# Altium PCB DCDC_1.0.0.PcbDoc
Units mm, origin at the board's own origin, x right, y up, seen from the top; angles counter-clockwise.
Board outline 30 x 19 mm, 2 copper layers (Component Side, Solder Side), stack 1.672 mm thick; 32 components, 9 nets, 68 pads, 25 vias.
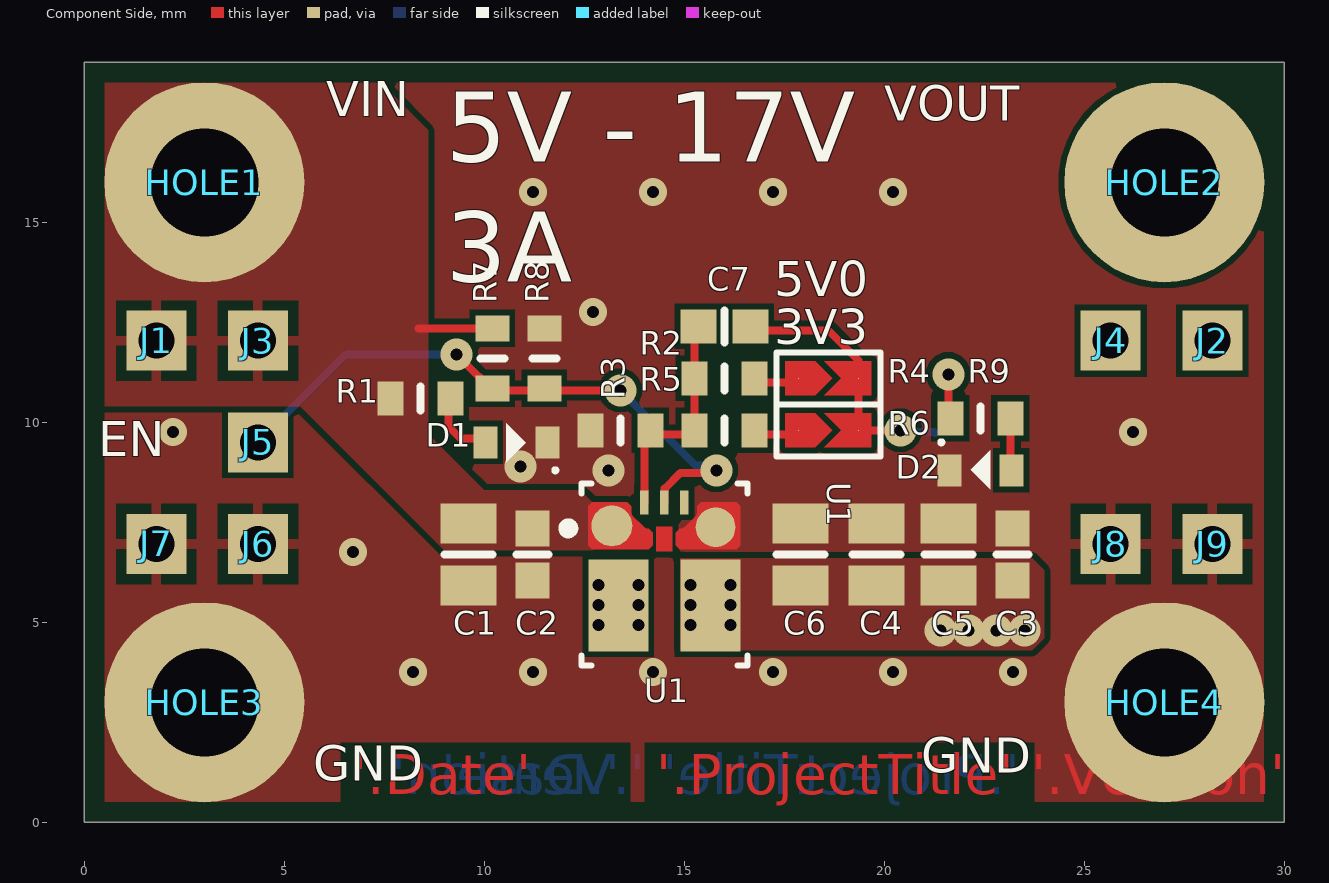
[diagram p0: Component Side view]
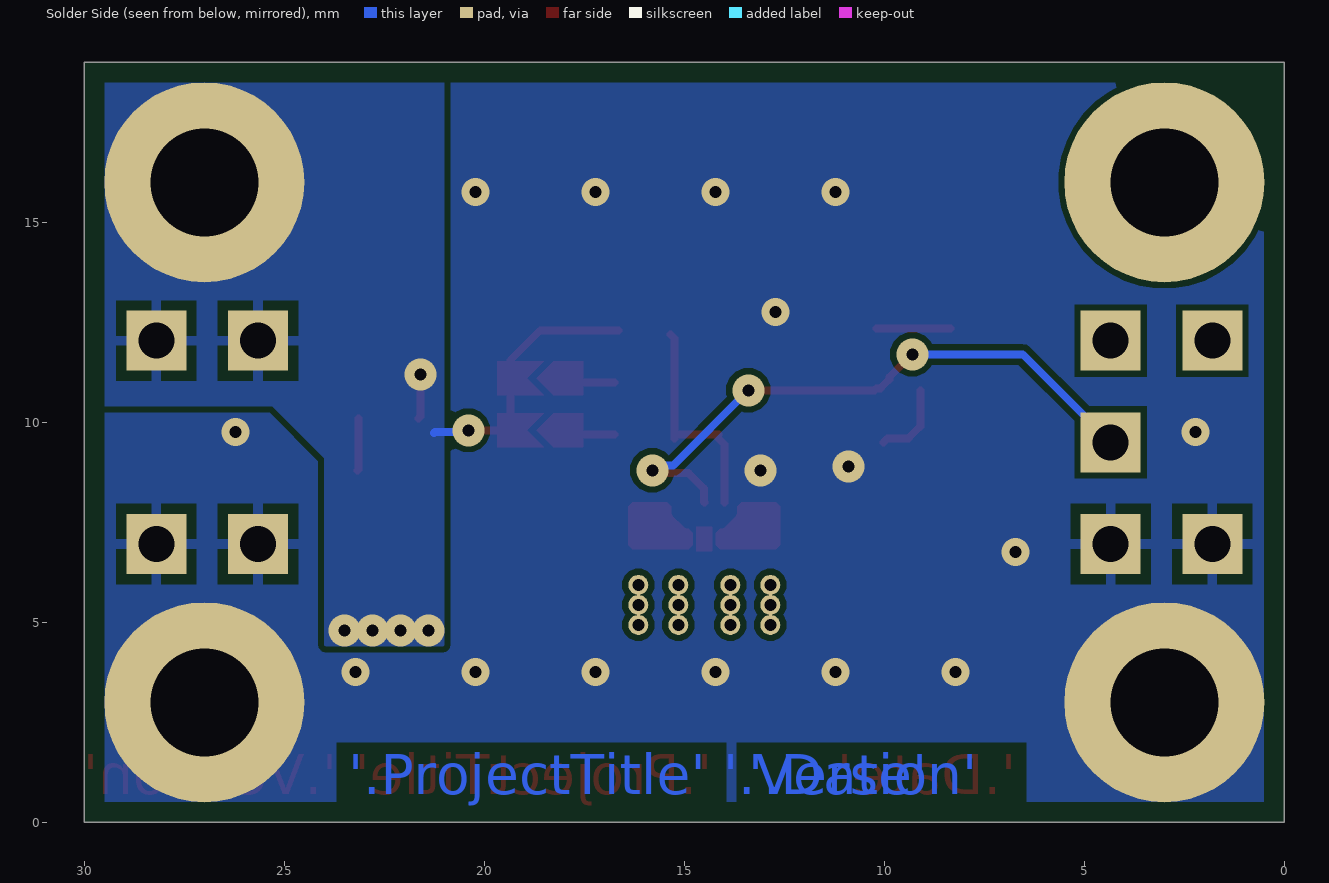
[diagram p1: Solder Side view, seen from below]
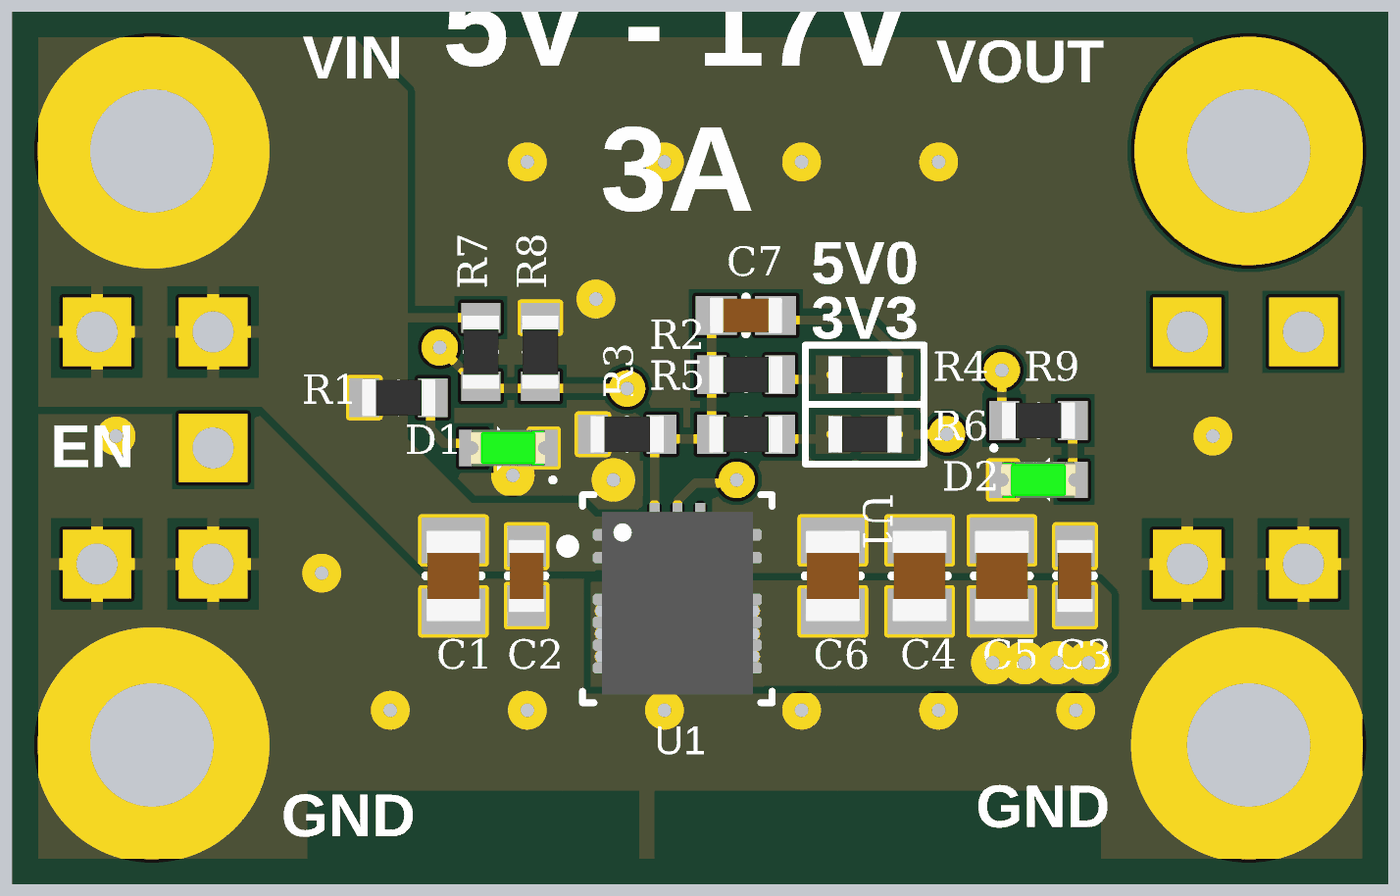
[diagram p2: 3D render of the assembled board from above, using the file's embedded part models]

## Layer stack, top to bottom
Top Solder: solder mask 0.0102, Solder Resist, Dk 3.5
Component Side: signal copper 0.036
Dielectric 3: core 1.6, IS400, Dk 4.2
Solder Side: signal copper 0.036
Bottom Solder: solder mask 0.0102, Solder Resist, Dk 3.5

## Board outline
0,0 30,0 30,19 0,19

## Design rules (kind name [scope] priority, off if disabled: settings)
AcuteAngle [All] p1: minimum=7.50000000000000E+0001 checktracksonly=FALSE
BoardOutlineClearance [Not InComponent('MFG1') and not HasFootprint('FCI-87583') and not HasFootprint('TE-1734346-1') and not  HasFootprint('PJ-002AH-SMT') and not HasFootprint('43045-0209') and not HasFootprint('43045-0609')] p1: gap=0.5 ignorepadtopadclearanceinfootprint=FALSE
Clearance [All] p1: gap=0.15 ignorepadtopadclearanceinfootprint=FALSE
ComponentClearance ComponentClearance_USB-C [HasFootprint('TE-1734346-1') vs HasFootprint('12401899E412A')] p1: gap=-100 collisioncheckmode=3 verticalgap=-100 showdistances=FALSE
ComponentClearance [All] p2: gap=0.15 collisioncheckmode=3 verticalgap=0.2 showdistances=FALSE
DiffPairsRouting DiffPairsRouting_90 [InNetClass('DIFF90')] p1: maxlimit=0.15 minlimit=0.15 mostfreqgap=0.15 toplayer_minwidth=0.201 toplayer_maxwidth=0.201 toplayer_prefwidth=0.201 bottomlayer_minwidth=0.201 bottomlayer_maxwidth=0.201 bottomlayer_prefwidth=0.201 impedanceprofiledriven=TRUE impedanceprofileid={D5A6658E-1D40-4F00-AA94-CC83166888A4} impedanceprofilevalue=90.000000 maxuncoupledlength=12.7
FanoutControl Fanout_BGA [IsBGA] p1: bgadir=Out bgaviamode=Centered fanoutstyle=BGA fanoutdirection=Alternating viagrid=0.025 // Fanout_BGA (Default Rule)
Height "Height Bottom" [OnLayer('L10')] p1: minheight=0 maxheight=50 prefheight=3
Height "Height Top" [OnLayer('L1')] p2: minheight=0 maxheight=50 prefheight=2
HoleSize [All] p1: absolutevalues=TRUE maxlimit=5 minlimit=0.2 maxpercent=80.000 minpercent=20.000
HoleToHoleClearance HoleToHoleClearance_USB-C [All vs HasFootprint('12401899E412A')] p1: gap=-10 allowstackedmicrovias=TRUE
HoleToHoleClearance [All] p2: gap=0.1 allowstackedmicrovias=TRUE
MatchedLengths [InNetClass('DIFF90')] p1: tolerance=0.1 checknetsindiffpair=TRUE checkdiffpairvsdiffpair=FALSE checkxsignals=FALSE checkothers=FALSE
MinimumSolderMaskSliver [All] p1: minsoldermaskwidth=0.149
PlaneClearance [All] p1: clearance=0.152
PlaneConnect "PlaneConnect - Via" [IsVia] p1: planeconnectstyle=Direct reliefexpansion=0.508 reliefentries=4 reliefconductorwidth=0.254 reliefairgap=0.254
PlaneConnect [All] p2: planeconnectstyle=Direct reliefexpansion=0.508 reliefentries=4 reliefconductorwidth=0.254 reliefairgap=0.254
PolygonConnect "PolygonConnect - Via" [IsVia] p1: connectstyle=Direct reliefconductorwidth=0.254 reliefentries=4 polygonreliefangle="90 Angle" airgapwidth=0.254
PolygonConnect "PolygonConnect - Via_1" [(HasFootprint('RDX0007A-MFG') OR HasFootprint('M2.5 Screw hole'))] p2: connectstyle=Direct reliefconductorwidth=0.254 reliefentries=4 polygonreliefangle="90 Angle" airgapwidth=0.254
PolygonConnect [All] p3: thpad.connectstyle=Relief thpad.reliefconductorwidth=0.254 thpad.reliefentries=4 thpad.polygonreliefangle="90 Angle" thpad.airgapwidth=0.254 thpad.conductorbypadedge=TRUE thpad.mindistance=0.381 thpad.enablemindistance=FALSE smdpad.connectstyle=Direct smdpad.reliefconductorwidth=0.254 smdpad.reliefentries=4 smdpad.polygonreliefangle="90 Angle" smdpad.airgapwidth=0.254 via.connectstyle=Direct via.reliefconductorwidth=0.254 via.reliefentries=4 via.polygonreliefangle="90 Angle" via.airgapwidth=0.254
ReturnPath [InNetClass('DIFF90')] p1 off: impedanceprofileid={D5A6658E-1D40-4F00-AA94-CC83166888A4} _gaplimit=0 _useantipads=TRUE
RoutingVias [All] p1: holewidth=0.2 width=0.6 viastyle="Through Hole" minholewidth=0.2 minwidth=0.5 maxholewidth=0.508 maxwidth=2.032
SMDEntry [All] p1: side=TRUE corner=FALSE anyangle=TRUE
SilkToSilkClearance [All] p1: silktosilkclearance=0.1
SilkToSolderMaskClearance [IsPad] p1: minsilkscreentomaskgap=0.08 clearancetoexposedcopper=TRUE
SolderMaskExpansion "SolderMaskExpansion - Via" [IsVia] p1: expansion=0.05 istentingtop=FALSE soldermaskfromhole=TRUE
SolderMaskExpansion [All] p2: expansion=0.075 istentingtop=FALSE
SupplyNets "Schematic Supply Nets_2" [InNet('GND')] p1: voltage=0.000
Width "Width - Power" [(InNetClass('Power GND') OR InNetClass('Power Vcc') OR InNetClass('Power Net'))] p1: maxlimit=5 minlimit=0.2 preferedwidth=0.5
Width [All] p2: maxlimit=5 minlimit=0.2 preferedwidth=0.2
19 further rules are at their usual default settings.

## Components (designator, comment, footprint, x,y, rotation, side; value= is the part's Value field where it differs from the comment)
C1 "10uF/25V/10%/X5R" C-0805 9.6,6.7 r90 top
C2 "100nF/50V/5%/X7R" C-0603 11.2,6.7 r90 top
C3 "100nF/50V/5%/X7R" C-0603 23.2,6.7 r270 top
C4 "22uF/25V/20%/X5R" C-0805 19.8,6.7 r270 top
C5 "22uF/25V/20%/X5R" C-0805 21.6,6.7 r270 top
C6 "22uF/25V/20%/X5R" C-0805 17.9,6.7 r270 top
C7 "22pF/50V/5%/NP0" C-0603 16.001,12.4 r0 top
D1 "LED R" "LED-0603 RED" 10.8,9.5 r180 top
D2 "LED R" "LED-0603 RED" 22.4,8.8 r0 top
HOLE1 "Hole M2.5 screw" "M2.5 Screw hole" 3,16 r90 top
HOLE2 "Hole M2.5 screw" "M2.5 Screw hole" 27,16 r90 top
HOLE3 "Hole M2.5 screw" "M2.5 Screw hole" 3,3 r90 top
HOLE4 "Hole M2.5 screw" "M2.5 Screw hole" 27,3 r90 top
J1 "PAD1G01" HDR1X01S 1.8,12.04 r90 top
J2 "PAD1G01" HDR1X01S 28.2,12.04 r0 top
J3 "PAD1G01" HDR1X01S 4.34,12.04 r0 top
J4 "PAD1G01" HDR1X01S 25.66,12.04 r0 top
J5 "PAD1G01" HDR1X01S 4.34,9.5 r0 top
J6 "PAD1G01" HDR1X01S 4.34,6.96 r0 top
J7 "PAD1G01" HDR1X01S 1.8,6.96 r0 top
J8 "PAD1G01" HDR1X01S 25.66,6.96 r0 top
J9 "PAD1G01" HDR1X01S 28.2,6.96 r0 top
R1 "1k 1%" R-0603 8.4,10.6 r0 top value=1k
R2 "200k 1%" R-0603 16.001,11.1 r0 top value=200k
R3 "27k 1%" R-0603 13.401,9.8 r180 top value=30k
R4 "0R" R-0603-SB 18.601,11.1 r0 top
R5 "120k 1%" R-0603 16.001,9.8 r0 top value=30k
R6 "0R" R-0603-SB 18.601,9.8 r0 top
R7 "200k 1%" R-0603 10.2,11.6 r270 top value=200k
R8 "100k 1%" R-0603 11.5,11.6 r270 top value=100k
R9 "1k 1%" R-0603 22.4,10.1 r0 top value=1k
U1 "PTPSM863257RDXR" RDX0007A-MFG 14.5,6.1 r0 top

## Footprints (in the part's own frame and the unit in brackets; to place one, negate y for a bottom-side part, rotate by r counter-clockwise, add the part's x,y. Pads: shape width x height; smd on the part's side, far side on the other; paste and mask are expansions set on the pad)
C-0603 [mm]
  rect 0.9x0.85 smd: 1(-0.65,0) 2(0.65,0)
  silkscreen extent 0,-0.4 0,0.4, body extent -0.8,-0.4 0.8,0.4, height 0.8
C-0805 [mm]
  rect 1x1.4 smd: 1(-0.775,0) 2(0.775,0)
  silkscreen extent 0,-0.6 0,0.6, body extent -1,-0.6 1,0.6, height 1.2
HDR1X01S [mm] "Connector; Header; 1 Position"
  rect 1.5x1.5 hole 0.9: 1(0,0)
"LED-0603 RED" [mm] "SODFL, 2-Leads, Body 0,80x1,65mm, IPC Medium Density"
  rect 0.6x0.8 smd: 1(-0.775,0) 2(0.775,0)
  silkscreen extent -1.02,-0.48 0.25,0.75, body extent -0.81,-0.4 0.81,0.4, height 0.6
"M2.5 Screw hole" [mm] "M2.5 Screw hole"
  round 5 hole 2.7: 1(0,0)
R-0603 [mm]
  rect 0.65x0.85 smd: 1(-0.75,0) 2(0.75,0)
  silkscreen extent 0,-0.3 0,0.3, body extent -0.8,-0.4 0.8,0.4, height 0.4
R-0603-SB [mil] "0603 Solder bridge"
  round 1 smd: 1(-29.53,0) 2(29.53,0)
  Component Side region: -42.34,16.73 -12.81,16.73 3.92,0 -12.81,-16.73 -42.34,-16.73
  Component Side region: 42.34,16.73 -3.92,16.73 12.82,0 -3.92,-16.73 42.34,-16.73
  silkscreen extent -51,-26 51,26, body extent -31,-16 32,16, height 16
RDX0007A-MFG [mm]
  round 1.025 smd paste-0.5 mask-0.495: 1(-1.312,1.312)
  rect 1.5x2.3 smd paste-1.137 mask-1.143: 2(-1.15,-0.675) 3(1.15,-0.675)
  round 0.991 smd paste-0.483 mask-0.483: 4(1.281,1.276)
  rect 0.22x0.6 smd paste+0 mask-0.292: 5(0.5,1.9) 6(0,1.9) 7(-0.5,1.9)
  round 0.5 hole 0.3 paste-2539.97 mask-0.241: 8(-1.65,-0.165) 9(-1.65,-0.665) 10(-1.65,-1.165) 11(1.65,-0.165) 12(1.65,-0.665) 13(1.65,-1.165) 14(-0.65,-0.165) 15(-0.65,-0.665) 16(-0.65,-1.165) 17(0.65,-0.165) 18(0.65,-0.665) 19(0.65,-1.165)
  Component Side region: -0.2,1.295 -0.2,0.675 0.2,0.675 0.2,1.295
  Component Side region: 1.9,0.825 1.9,1.8 1.8,1.9 0.925,1.9 0.825,1.8 0.825,1.634 0.796,1.563 0.507,1.274 0.436,1.245 0.39,1.245 0.29,1.145 0.29,0.825 0.39,0.725 1.8,0.725
  Component Side region: -1.9,0.825 -1.9,1.8 -1.8,1.9 -0.925,1.9 -0.825,1.8 -0.825,1.634 -0.796,1.563 -0.507,1.274 -0.436,1.245 -0.39,1.245 -0.29,1.145 -0.29,0.825 -0.39,0.725 -1.8,0.725
  silkscreen extent -2.52,-2.17 2.07,2.37, body extent -1.65,-2 1.65,2, height 2.11

## Part data
C1: library part CMP-034-0080-6, "SMD Ceramic Capacitor 0805 10uF/25V/10%/X5R", Capacitance=10uF, Case/Package=0805, Dielectric=X5R, LCSC=C15850, Tolerance=10%, Voltage=25V, IFS Description prefix="CAP-0805 10uF/25V/10%/X5R", IFS PN=114548, Part Status=Unknown
C2 C3: library part CMP-001-00102-2, "SMD Ceramic Capacitor 0603 100nF/50V/5%/X7R", Capacitance=100nF, Case/Package=0603, Dielectric=X7R, LCSC=C14663, Tolerance=5%, Voltage=50V, IFS Description prefix="CAP-0603 4.7uF/10V/10%/X5R", IFS PN=102637, Part Status=Unknown
C4 C5 C6: library part CMP-034-0192-6, "SMD Ceramic Capacitor 0805 22uF/25V/20%/X5R", Capacitance=22uF, Case/Package=0805, Dielectric=X5R, LCSC=C45783, Tolerance=20%, Voltage=25V, IFS Description prefix="CAP-0805 22uF/25V/20%/X5R", IFS PN=101494, Part Status=Unknown
C7: library part CMP-034-0036-7, "SMD Ceramic Capacitor 0603 22pF/50V/5%/NP0", Capacitance=22pF, Case/Package=0603, Dielectric=NP0, LCSC=C1653, Tolerance=5%, Voltage=50V, IFS Description prefix="CAP-0603 22pF/50V/5%/NP0", IFS PN=102554, Part Status=Unknown
D1 D2: library part CMP-007-00003-1, "LED; SMD; 0603; červená; 8-15mcd; 1,6x0,8x1,1mm; 150°; 2,0÷2,5V; 20mA", Case/Package=LED-0603, LCSC=C2286, IFS Description prefix=DIO-APT1608EC, IFS PN=102044, Part Status=Active
HOLE1 HOLE2 HOLE3 HOLE4: library part CMP-00028-00012-1, "Hole for M2.5 screw", Part Status=Unknown
J1 J2 J3 J4 J5 J6 J7 J8 J9: library part CMP-002-00043-1, "1x1pin single pad", IFS Description prefix=CON-PAD1G02
R1 R9: library part CMP-048-0019-7, "SMD Resistor 0603 1k 1%", Case/Package=0603, LCSC=C21190, Power=100mW, Tolerance=1%, IFS Description prefix="RES-0603 1k 1%", IFS PN=105590, Part Status=Unknown
R2 R7: library part CMP-048-0111-7, "SMD Resistor 0603 200k 1%", Case/Package=0603, LCSC=C25811, Power=100mW, Tolerance=5%, IFS Description prefix="RES-0603 200k 5%", IFS PN=100319, Part Status=Unknown
R3: library part CMP-048-0152-7, "SMD Resistor 0603 27k 1%", Case/Package=0603, LCSC=C22967, Power=100mW, Tolerance=1%, IFS Description prefix="RES-0603 30k 1%", IFS PN=114999, Part Status=Unknown
R4 R6: library part CMP-048-0001-9, "SMD Resistor 0603 0R", Case/Package=0603, LCSC=C21189, Power=100mW, Tolerance=5%, IFS Description prefix="RES-0603 0R", IFS PN=100039, Part Status=Active
R5: library part CMP-048-0152-7, "SMD Resistor 0603 120k 1%", Case/Package=0603, LCSC=C25808, Power=100mW, Tolerance=1%, IFS Description prefix="RES-0603 30k 1%", IFS PN=114999, Part Status=Unknown
R8: library part CMP-048-0002-7, "SMD Resistor 0603 100k 1%", Case/Package=0603, LCSC=C25803, Power=100mW, Tolerance=1%, IFS Description prefix="RES-0603 100k 1%", IFS PN=102703, Part Status=Unknown
U1: "3-V to 17-V input voltage, 3-A forced-CCM synchronous buck module 7-QFN-FCMOD -40 to 125", LCSC=C19190416, Manufacturer_Name="Texas Instruments", Copyright="Copyright (C) 2026 Ultra Librarian. All rights reserved.", Manufacturer_Part_Number=PTPSM863257RDXR, RefDes=RefDes, TYPE=TYPE

## Via types
v1: diameter 0.7, hole 0.3, Component Side to Solder Side, 14 vias
v2: diameter 0.8, hole 0.3, Component Side to Solder Side, 11 vias

## Nets (pads, with @x,y where several pads share a name; then routed paths per layer and width w, separated by ;. In a path a pad name is that pad's centre, name@x,y a point inside that pad or via, vN(x,y) a via of type N, cw(c..) or ccw(c..) an arc to the next point about the centre after c; other vN are vias at no path point)
GND: C1.1 C2.1 C3.1 C4.1 C5.1 C6.1 D1.1 D2.1 HOLE3.1 HOLE4.1 J6.1 J7.1 J8.1 J9.1 R3.2 R8.1 U1.4
  other v1: 8.217,3.76 11.217,3.76 14.217,3.76 17.217,3.76 20.217,3.76 23.217,3.76 6.717,6.76 2.217,9.76 26.217,9.76 12.717,12.76 11.217,15.76 14.217,15.76 17.217,15.76 20.217,15.76
  other v2: 13.1,8.8 10.9,8.9
NetC1_2: C1.2 C2.2 HOLE1.1 J1.1 J3.1 R1.1 R7.1 U1.1 | length 1.8
  Component Side w0.2: 8.35,12.35 R7.1
NetC3_2: C3.2 C4.2 C5.2 C6.2 C7.2 HOLE2.1 J2.1 J4.1 R4.2 R6.2 R9.1 U1.3 U1.11 U1.12 U1.13 U1.17 U1.18 U1.19 | length 7.8
  Component Side w0.2: C7.2@16.65,12.3 18.6,12.3 19.35,11.55 19.35,10.9 R6.2 ; R6.2 v2(20.4,9.8) ; v2(21.6,11.2) 21.6,10.15 R9.1
  Solder Side w0.2: v2(20.4,9.8) 20.436,9.764 21.236,9.764 21.262,9.738
  other v2: 21.4,4.8 22.1,4.8 22.8,4.8 23.5,4.8
NetC7_1: C7.1 R2.1 R3.1 R5.1 U1.7 | length 5.4
  Component Side w0.2: U1.7 14,9.45 R3.1@14.15,9.6 ; R3.1@14.15,9.7 R5.1@15.25,9.7 ; R5.1@15.25,9.6 15.25,10.9 15.25,12.1 C7.1@15.35,12.2
NetD1_2: D1.2 R1.2 | length 2
  Component Side w0.2: R1.2@9.1,10.8 9.1,9.9 9.4,9.6 9.925,9.6 D1.2
NetD2_2: D2.2 R9.2 | length 1.3
  Component Side w0.2: R9.2 23.15,8.825 D2.2
NetJ5_1: J5.1 R7.2 R8.2 U1.6 | length 15.4
  Component Side w0.2: v2(9.3,11.7) 9.304,11.7 9.875,11.129 9.875,11.075 10.1,10.85 R7.2 10.25,10.8 11.5,10.8 v2(13.4,10.8) ; U1.6 14.51,8.01 14.51,8.341 14.9,8.731 15.731,8.731 v2(15.8,8.8)
  Solder Side w0.2: J5.1 6.54,11.7 v2(9.3,11.7) ; v2(13.4,10.8) 15.285,8.915 15.685,8.915 v2(15.8,8.8)
NetR2_2: R2.2 R4.1 | length 1.1
  Component Side w0.2: R2.2@16.75,11 17.85,11
NetR5_2: R5.2 R6.1 | length 1.1
  Component Side w0.2: R5.2@16.75,9.7 17.85,9.7
pads on no net: U1.2 U1.5 U1.8 U1.9 U1.10 U1.14 U1.15 U1.16

## Polygon pours and split planes (outlines as drawn)
NetC3_2 on Solder Side "NONET_L-01_P-001" (solid, remove dead copper, pour order 25): 24,4.4 24,9.1 25.3,10.4 30,10.4 30,19 21,19 21,4.4
GND on Solder Side "NONET_L-01_P-001" (solid, remove dead copper, pour order 29): 0,19 30,19 30,0 0,0
NetC1_2 on Component Side "NONET_L-01_P-001" (solid, remove dead copper, pour order 27): 0,19 6.9,19 8.6,17.3 8.6,9.7 10,8.3 12.4,8.3 12.825,7.875 12.825,6.925 12.7,6.8 9,6.8 5.4,10.4 0,10.4
NetC3_2 on Component Side "NONET_L-01_P-001" (solid, remove dead copper, pour order 26): 14.9,6.6 23.7,6.6 24,6.3 24,4.6 23.7,4.3 14.9,4.3
GND on Component Side "NONET_L-01_P-001" (solid, remove dead copper, pour order 28): 0,19 30,19 30,0 0,0

## Other copper
Component Side:
  text "'.Date'" at 6.7,0.7 h1
  text "'.ProjectTitle' '.Version'" at 14.3,0.7 h1
Solder Side:
  text "'.Date'" at 13.4,0.7 h1
  text "'.ProjectTitle' '.Version'" at 23.4,0.7 h1

## Silkscreen, mask and mechanical layers (free items; w line width, h text height)
Top Overlay:
  text "VIN" at 6.05,17.369 h1.5
  text "VOUT" at 19.999,17.253 h1.5
  text "5V - 17V / 3A" at 9.038,12.94 h3
  text "5V0" at 17.25,12.859 h1.5
  text "3V3" at 17.25,11.659 h1.5
  text "EN" at 0.35,8.869 h1.5
  text "GND" at 20.924,0.953 h1.5
  text "GND" at 5.724,0.753 h1.5
Board:
  the board outline again, w0.1
Fab Notes:
  drawing of 191 lines, arcs and shapes, not listed
  text "Layer" at 44.497,-37.124 h1.52
  text "Name" at 54.909,-37.124 h1.52
  text "Material" at 78.778,-37.124 h1.52
  text "Thickness" at 100.616,-37.124 h1.52
  text "Constant" at 117.122,-37.124 h1.52
  text "Board Layer Stack" at 131.596,-37.124 h1.52
  text "Top Overlay" at 54.909,-40.172 h1.52
  text "Top Solder" at 54.909,-43.22 h1.52
  text "Solder Resist" at 78.778,-43.22 h1.52
  text "0,010mm" at 100.616,-43.22 h1.52
  text "3.5" at 117.122,-43.22 h1.52
  text "1" at 44.497,-46.268 h1.52
  text "Component Side" at 54.909,-46.268 h1.52
  text "0,036mm" at 100.616,-46.268 h1.52
  text "Dielectric 3" at 54.909,-49.316 h1.52
  text "IS400" at 78.778,-49.316 h1.52
  text "1,600mm" at 100.616,-49.316 h1.52
  text "4.2" at 117.122,-49.316 h1.52
  text "2" at 44.497,-52.364 h1.52
  text "Solder Side" at 54.909,-52.364 h1.52
  text "0,036mm" at 100.616,-52.364 h1.52
  text "Bottom Solder" at 54.909,-55.412 h1.52
  text "Solder Resist" at 78.778,-55.412 h1.52
  text "0,010mm" at 100.616,-55.412 h1.52
  text "3.5" at 117.122,-55.412 h1.52
  text "Bottom Overlay" at 54.909,-58.46 h1.52
  text "Total board thickness:" at 44.497,-61.508 h1.52
  text "1,692mm" at 100.616,-61.508 h1.52